# EAGLE board daughterboard (EAGLE 4.16)
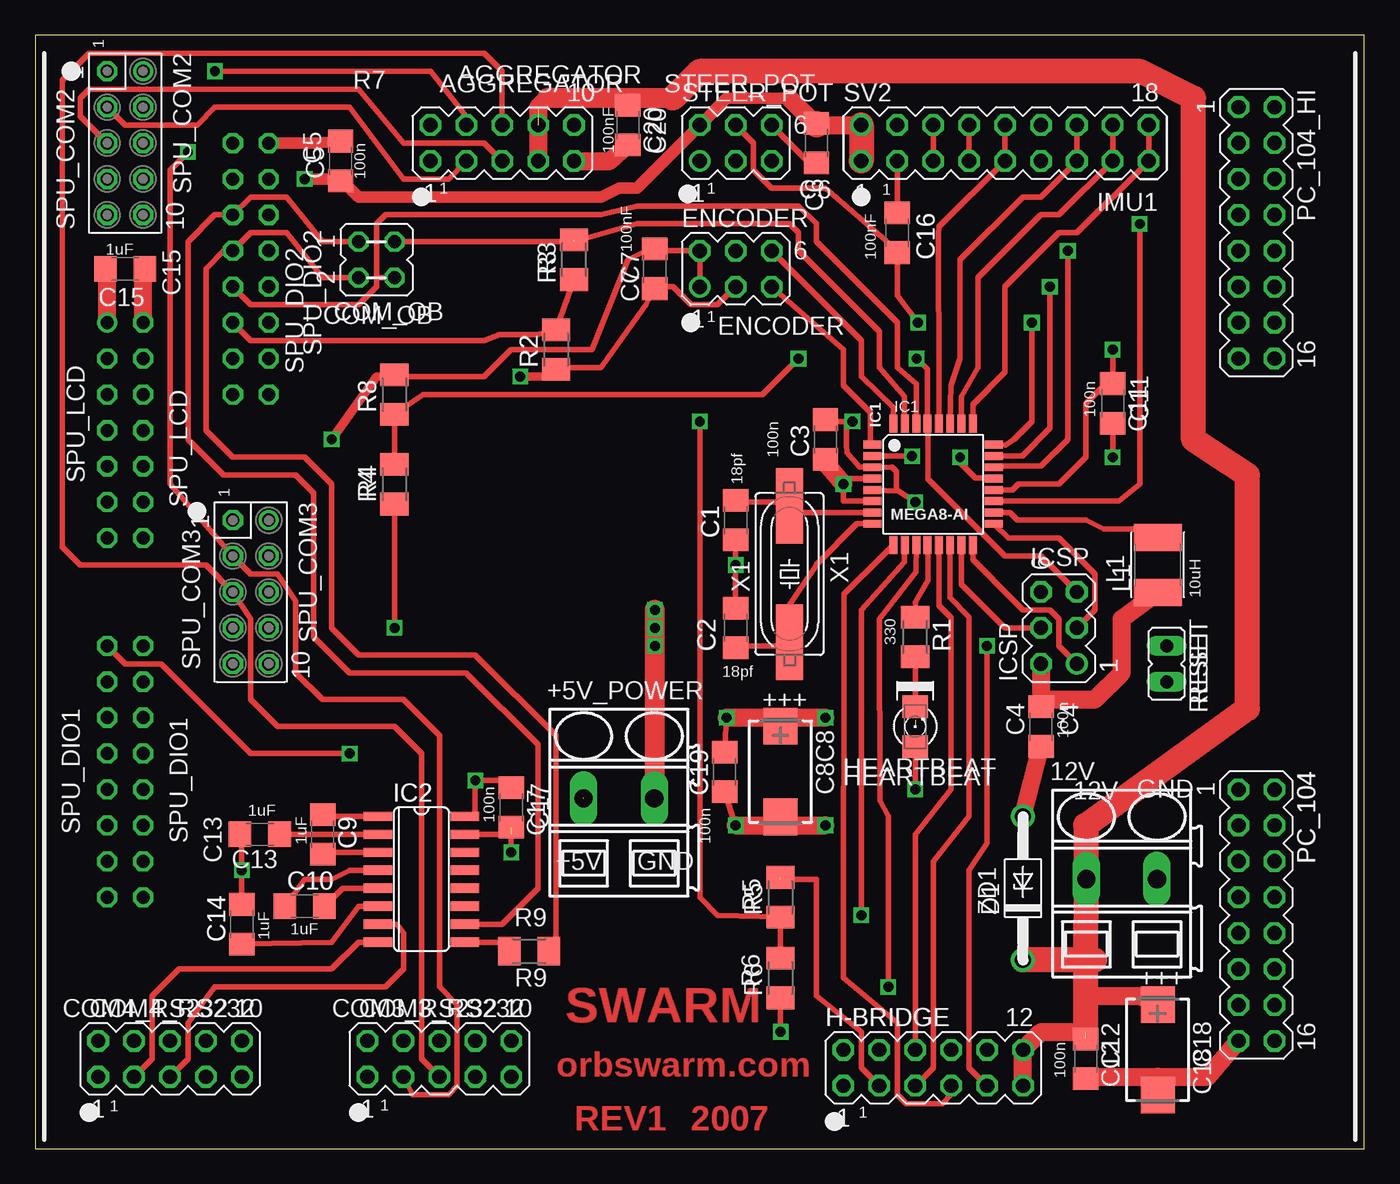
[diagram p0: board, top side]
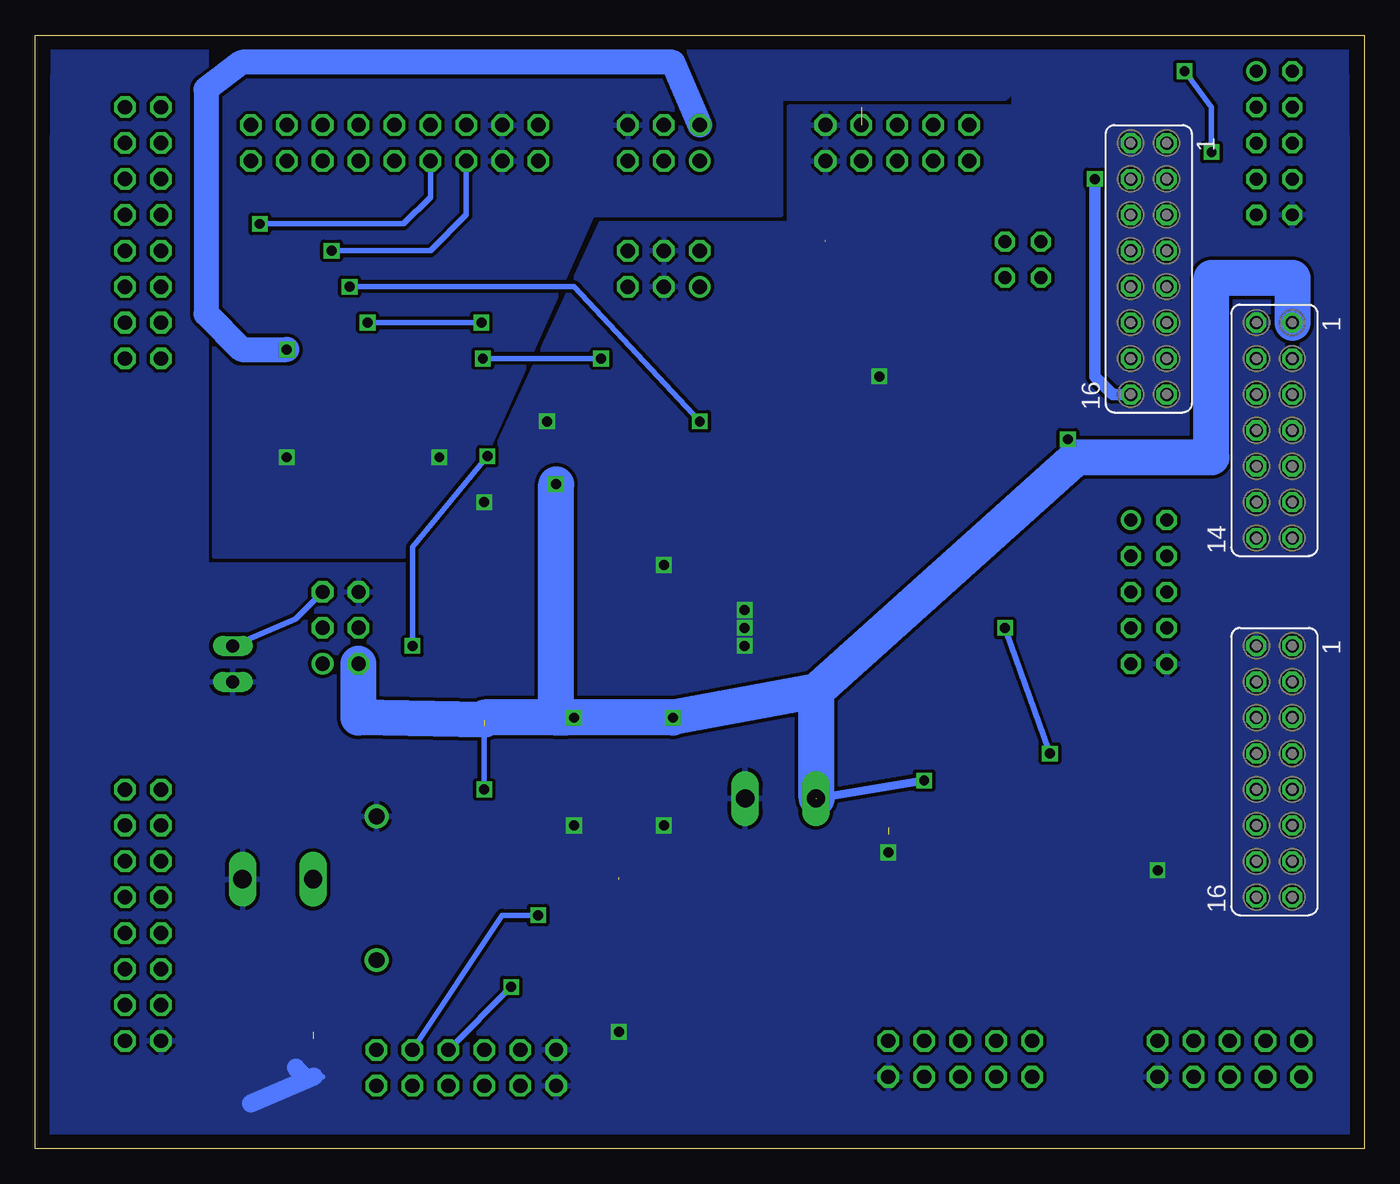
[diagram p1: board, bottom side, seen from below]

Size 93.98 x 78.74 mm. Coordinates in mm from the lower left corner, seen from the top.
Outline: 0,0 93.98,0 93.98,78.74 0,78.74 0,0
Copper layers (1*16): Top 0.035mm / dielectric 1.5mm / Bottom 0.035mm
Design rules "default": minimum track width 10mil, minimum drill 24mil, track to track 8mil, track to pad 8mil, pad to pad 8mil, via to via 8mil, smd to smd 8mil, copper to edge 40mil, drill to drill 8mil, minimum pad ring 10mil, minimum via ring 8mil, stop-mask expansion 4mil, vias tented up to drill 0mil, thermal gap 10mil

## Footprints (pad centres in the part's own frame; a part is rotated, then mirrored left to right if it is on the bottom)
SMKDSP_1,5/2 = drill 1.3 pad 1.676 long: 1 -2.5,0; 2 2.5,0
MA05-2 = drill 1.016 octagon: 1 -5.08,-1.27; 2 -2.54,-1.27; 3 0,-1.27; 4 2.54,-1.27; 5 5.08,-1.27; 6 -5.08,1.27; 7 -2.54,1.27; 8 0,1.27; 9 2.54,1.27; 10 5.08,1.27
C1206 = smd 1.6 x 1.8: 1 -1.4,0; 2 1.4,0
CT7343 = smd 2.6 x 2.4: + 3.2,0; - -3.2,0
JP2Q = drill 0.914 octagon: 1 -1.27,-1.27; 2 -1.27,1.27; 3 1.27,-1.27; 4 1.27,1.27
DO41Z10 = drill 1.118 round: A 5.08,0; C -5.08,0
MA03-2 = drill 1.016 round: 1 -2.54,-1.27 | drill 1.016 octagon: 2 -2.54,1.27; 3 0,-1.27; 4 0,1.27; 5 2.54,-1.27; 6 2.54,1.27
MA06-2 = drill 1.016 octagon: 1 -6.35,-1.27; 2 -6.35,1.27; 3 -3.81,-1.27; 4 -3.81,1.27; 5 -1.27,-1.27; 6 -1.27,1.27; 7 1.27,-1.27; 8 1.27,1.27; 9 3.81,-1.27; 10 3.81,1.27; 11 6.35,-1.27; 12 6.35,1.27
1206 = smd 1.6 x 1.803: A -1.422,0; C 1.422,0
TQFP32-08 = smd 1.27 x 0.559: 1 -4.293,2.8; 2 -4.293,2; 3 -4.293,1.2; 4 -4.293,0.4; 5 -4.293,-0.4; 6 -4.293,-1.2; 7 -4.293,-2; 8 -4.293,-2.8; 17 4.293,-2.8; 18 4.293,-2; 19 4.293,-1.2; 20 4.293,-0.4; 21 4.293,0.4; 22 4.293,1.2; 23 4.293,2; 24 4.293,2.8 | smd 0.559 x 1.27: 9 -2.8,-4.293; 10 -2,-4.293; 11 -1.2,-4.293; 12 -0.4,-4.293; 13 0.4,-4.293; 14 1.2,-4.293; 15 2,-4.293; 16 2.8,-4.293; 25 2.8,4.293; 26 2,4.293; 27 1.2,4.293; 28 0.4,4.293; 29 -0.4,4.293; 30 -1.2,4.293; 31 -2,4.293; 32 -2.8,4.293
SO16 = smd 0.66 x 2.032: 1 -4.445,-3.073; 2 -3.175,-3.073; 3 -1.905,-3.073; 4 -0.635,-3.073; 5 0.635,-3.073; 6 1.905,-3.073; 7 3.175,-3.073; 8 4.445,-3.073; 9 4.445,3.073; 10 3.175,3.073; 11 1.905,3.073; 12 0.635,3.073; 13 -0.635,3.073; 14 -1.905,3.073; 15 -3.175,3.073; 16 -4.445,3.073
L1812 = smd 1.9 x 3.4: 1 -1.95,0; 2 1.95,0
MA08-2 = drill 1.016 octagon: 1 -8.89,-1.27; 2 -8.89,1.27; 3 -6.35,-1.27; 4 -6.35,1.27; 5 -3.81,-1.27; 6 -3.81,1.27; 7 -1.27,-1.27; 8 -1.27,1.27; 9 1.27,-1.27; 10 1.27,1.27; 11 3.81,-1.27; 12 3.81,1.27; 13 6.35,-1.27; 14 6.35,1.27; 15 8.89,-1.27; 16 8.89,1.27
M1206 = smd 1.6 x 2: 1 -1.4,0; 2 1.4,0
JP1 = drill 0.914 long: 1 0,-1.27; 2 0,1.27
FE05-2 = drill 0.914 octagon: 1 -5.08,-1.27; 2 -2.54,-1.27; 3 0,-1.27; 4 2.54,-1.27; 5 5.08,-1.27; 7 -2.54,1.27; 8 0,1.27; 9 2.54,1.27; 10 5.08,1.27 | drill 0.914 round: 6 -5.08,1.27
FE08-2 = drill 0.914 octagon: 1 -8.89,1.27; 2 -8.89,-1.27; 3 -6.35,1.27; 4 -6.35,-1.27; 5 -3.81,1.27; 6 -3.81,-1.27; 7 -1.27,1.27; 8 -1.27,-1.27; 9 1.27,1.27; 10 1.27,-1.27; 11 3.81,1.27; 12 3.81,-1.27; 13 6.35,1.27; 14 6.35,-1.27; 15 8.89,1.27; 16 8.89,-1.27
FE07-2 = drill 0.914 round: 1 -7.62,1.27 | drill 0.914 octagon: 2 -7.62,-1.27; 3 -5.08,1.27; 4 -5.08,-1.27; 5 -2.54,1.27; 6 -2.54,-1.27; 7 0,1.27; 8 0,-1.27; 9 2.54,1.27; 10 2.54,-1.27; 11 5.08,1.27; 12 5.08,-1.27; 13 7.62,1.27; 14 7.62,-1.27
MA09-2 = drill 1.016 octagon: 1 -10.16,-1.27; 2 -10.16,1.27; 3 -7.62,-1.27; 4 -7.62,1.27; 5 -5.08,-1.27; 6 -5.08,1.27; 7 -2.54,-1.27; 8 -2.54,1.27; 9 0,-1.27; 10 0,1.27; 11 2.54,-1.27; 12 2.54,1.27; 13 5.08,-1.27; 14 5.08,1.27; 15 7.62,-1.27; 16 7.62,1.27; 17 10.16,-1.27; 18 10.16,1.27
HC49UP = smd 5.334 x 1.93: 1 -4.826,0; 2 4.826,0

## Placement (x,y rotation side)
12V  SMKDSP_1,5/2  [SMKDSP_1,5/2]  76.83,19.05 0 top
+5V_POWER  SMKDSP_1,5/2  [SMKDSP_1,5/2]  41.27,24.77 0 top
AGGREGATOR  [MA05-2]  33.02,71.12 0 top
C1  18pf  [C1206]  49.53,44.45 90 top
C2  18pf  [C1206]  49.53,36.83 270 top
C3  100n  [C1206]  55.88,50.16 90 top
C4  100n  [C1206]  71.12,29.84 90 top
C5  100n  [C1206]  21.59,69.85 90 top
C6  100nF  [C1206]  55.24,71.12 270 top
C7  100nF  [C1206]  43.81,62.23 270 top
C8  22uF  [CT7343]  52.7,26.67 90 top
C9  1uF  [C1206]  20.32,22.23 270 top
C10  1uF  [C1206]  19.05,17.14 0 top
C11  100n  [C1206]  76.2,52.7 270 top
C12  100n  [C1206]  74.3,6.35 270 top
C13  1uF  [C1206]  15.88,22.23 180 top
C14  1uF  [C1206]  14.61,15.88 90 top
C15  1uF  [C1206]  6.35,62.23 0 top
C16  100nF  [C1206]  60.96,64.77 90 top
C17  100n  [C1206]  33.66,24.13 270 top
C18  22uF  [CT7343]  79.38,6.99 90 top
C19  100n  [C1206]  48.74,26.64 270 top
C20  100n  [C1206]  41.91,72.39 270 top
COM3_RS232  [MA05-2]  28.57,6.35 0 top
COM4_RS232  [MA05-2]  9.53,6.35 0 top
COM_OB  [JP2Q]  24.13,62.87 270 top
D1  [DO41Z10]  69.85,18.41 90 top
ENCODER  [MA03-2]  49.53,62.23 0 top
H-BRIDGE  [MA06-2]  63.5,5.71 0 top
HEARTBEAT  [1206]  62.23,29.84 90 top
IC1  MEGA8-AI  [TQFP32-08]  63.5,46.99 0 top
IC2  MAX3232CSE  [SO16]  27.3,19.05 270 top
ICSP  [MA03-2]  72.39,36.83 90 top
L1  10uH  [L1812]  79.38,41.27 90 top
PC_104  [MA08-2]  86.36,16.51 270 top
PC_104_HI  [MA08-2]  86.36,64.77 270 top
R1  330  [M1206]  62.23,36.2 270 top
R2  1k  [M1206]  36.83,56.52 90 top
R3  510  [M1206]  38.1,62.87 270 top
R4  510  [M1206]  25.4,46.99 90 top
R5  510  [M1206]  52.7,17.78 90 top
R6  1k  [M1206]  52.7,12.06 90 top
R8  1k  [M1206]  25.4,53.34 90 top
R9  510  [M1206]  34.92,13.97 180 top
RESET  [JP1]  80.01,34.29 180 top
SPU_COM2  [FE05-2]  6.35,71.12 270 top
SPU_COM3  [FE05-2]  15.24,39.37 270 top
SPU_DIO1  [FE08-2]  6.35,26.67 270 bottom
SPU_DIO2  [FE08-2]  15.24,62.23 270 bottom
SPU_LCD  [FE07-2]  6.35,50.8 270 bottom
STEER_POT  [MA03-2]  49.53,71.12 0 top
SV2  [MA09-2]  68.58,71.12 0 top
X1  7.37 mHz  [HC49UP]  53.34,40.64 90 top

## Library data of the parts
12V +5V_POWER = con-phoenix-smkdsp
AGGREGATOR COM3_RS232 COM4_RS232 SPU_COM2 SPU_COM3 = foote
C1-C20 L1 R1-R6 R8 R9 = rcl
COM_OB RESET = jumper
D1 = diode
ENCODER H-BRIDGE ICSP PC_104 PC_104_HI STEER_POT SV2 = con-lstb
HEARTBEAT = led
IC1 = atmel
IC2 = maxim
SPU_DIO1 SPU_DIO2 SPU_LCD = con-lsta
X1 = crystal

## Nets
5V_AVR_TXD: COM_OB.2 IC1.31 R3.1
12V_POWER: 12V.1 AGGREGATOR.4 AGGREGATOR.9 C12.1 C18.+ C20.1 D1.C H-BRIDGE.11 H-BRIDGE.12
+3V3 [GND]: C5.1 C6.1 C11.1 IC1.20 SPU_DIO2.16 STEER_POT.2 SV2.1 SV2.2
+5V: +5V_POWER.1 C3.1 C4.2 C7.1 C8.+ C15.1 C17.1 C19.1 ENCODER.1 ENCODER.2 HEARTBEAT.A IC1.4 IC1.6 IC2.16 ICSP.2 L1.1 R8.2 SPU_LCD.1
ADC2: IC1.25 SV2.17 SV2.18
ADC3: IC1.26 SV2.15 SV2.16
ADC4: IC1.27 SV2.13 SV2.14
ADC5: IC1.28 SV2.9 SV2.10
ADC6: IC1.19 SV2.7 SV2.8
ADC7: IC1.22 SV2.5 SV2.6
AVR_RXD: COM_OB.4 IC1.30 SPU_DIO2.9
COM2_RXD: AGGREGATOR.2 SPU_COM2.2
COM2_TXD: AGGREGATOR.3 SPU_COM2.3
COM3_RXD: AGGREGATOR.7 COM3_RS232.2 SPU_COM3.2
COM3_TXD: AGGREGATOR.8 COM3_RS232.3 SPU_COM3.3
COM4_RXD: COM4_RS232.2 IC2.8
COM4_TXD: COM4_RS232.3 IC2.7
CURRENT_SENSE: IC1.23 R5.1 R6.2
DIO_0: R4.1 SPU_DIO1.1
DRIVE_ALI: H-BRIDGE.5 IC1.14
DRIVE_BLI: H-BRIDGE.9 IC1.2
DRIVE_CURRENT: H-BRIDGE.3 R5.2
DRIVE_DIS: H-BRIDGE.7 IC1.9
ENCODER_A: ENCODER.6 IC1.32
ENCODER_B: ENCODER.5 IC1.1
GND [GND]: 12V.2 +5V_POWER.2 AGGREGATOR.5 AGGREGATOR.10 C1.1 C2.1 C3.2 C4.1 C5.2 C6.2 C7.2 C8.- C11.2 C12.2 C13.2 C14.2 C15.2 C16.2 C17.2 C18.- C19.2 C20.2 COM3_RS232.5 COM4_RS232.5 D1.A ENCODER.3 ENCODER.4 H-BRIDGE.1 H-BRIDGE.2 IC1.3 IC1.5 IC1.21 IC2.15 ICSP.6 PC_104.15 R2.1 R6.1 RESET.2 SPU_COM2.5 SPU_COM3.5 SPU_DIO1.2 SPU_DIO2.2 SPU_LCD.2 STEER_POT.6 SV2.3 SV2.4
MCU_RST: IC1.29 ICSP.5 R4.2 R8.1 RESET.1
MISO/PB4: IC1.16 ICSP.1
MOSI/PB3: IC1.15 ICSP.4
N$1: IC1.12 R1.1
N$3: HEARTBEAT.C R1.2
N$4 [GND]: C1.2 IC1.7 X1.2
N$5: IC1.18 L1.2
N$7: C14.1 IC2.6
N$9 [GND]: C2.2 IC1.8 X1.1
N$10: C10.1 IC2.4
N$11: C13.1 IC2.2
N$12: C10.2 IC2.5
N$13: C9.2 IC2.3
N$15: C9.1 IC2.1
N$16: IC2.9 R9.2
SCK/PB5: IC1.17 ICSP.3
SPU_ADC2: SPU_DIO2.8
SPU_ADC4: SPU_DIO2.10
STEER_ALI: H-BRIDGE.6 IC1.13
STEER_BLI [GND]: H-BRIDGE.10 IC1.10
STEER_DIS: H-BRIDGE.8 IC1.11
STEERING_POT: C16.1 IC1.24 STEER_POT.4
TTL_COM4_RXD: COM_OB.3 R9.1 SPU_DIO2.7
TTL_COM4_TXD: COM_OB.1 IC2.10 SPU_DIO2.5
TTL_COM5_RXD: R2.2 R3.2 SPU_DIO2.11

## Tracks (layer width: path | path; a pad name or v marks a point on that pad's centre or on a via)
5V_AVR_TXD  (1 unrouted)
  Top 0.406: 38.73,64.77 R3.1 38.1,64.77 | IC1.31 61.47,51.33 61.47,53.19 59.69,55.24 59.69,57.78 53.98,63.5 53.98,64.77 53.34,65.41 42.55,65.41 38.1,64.14 COM_OB.2
12V_POWER  (2 unrouted)
  Top 0.406: 78.74,10.79 C18.+ | 74.93,13.34 | 74.31,13.34 74.93,13.34
  Top 1.27: 36.2,74.3 35.56,73.66 AGGREGATOR.4 | 41.91,74.3 C20.1 | C18.+ 79.33,10.79 78.08,10.79 | 78.08,10.79 C18.+ | 74.3,10.79 78.08,10.79 | 74.3,8.26 71.12,8.26 H-BRIDGE.12 H-BRIDGE.11
  Top 1.422: 45.09,74.3 41.91,74.3 36.2,74.3 | 12V.1 74.33,22.82 74.3,22.86
  Top 1.778: 45.09,74.3 46.99,76.2 78.11,76.2 81.92,74.3 81.92,50.16 85.72,47.62 85.72,31.11 74.3,22.86 74.3,19.05 | 12V.1 74.31,13.34 74.3,10.79 74.3,8.26 | 74.93,13.34 D1.C
+3V3  (via drill 0.7)
  Top 0.254: 76.2,54.61 C11.1
  Top 0.406: IC1.20 69.11,46.58 69.52,46.99 72.39,46.99 74.3,48.9 74.3,52.7 76.2,54.61 v76.2,56.52 | C5.1 21.59,68.58
  Top 0.813: 53.34,74.3 48.9,74.3 STEER_POT.2 42.55,67.94 41.27,67.94 40.01,67.31 22.86,67.31 21.59,68.58 | C5.1 21.46,68.58 v19.05,68.58
  Top 1.27: 53.34,74.3 55.24,72.39 SV2.2
  Top 1.778: SV2.2 SV2.1 | 55.24,72.39 C6.1
  Bottom 0.406: v76.2,56.52 77.47,56.52
  Bottom 0.813: v19.05,68.58 19.05,54.61 17.78,53.34 SPU_DIO2.16
  Bottom 1.778: STEER_POT.2 48.9,76.83 79.38,76.83 81.92,74.93 81.92,59.05 79.38,56.52 v76.2,56.52
+5V  (via drill 0.7)  (2 unrouted)
  Top 0.254: 53.34,30.48 C8.+
  Top 0.406: IC1.4 58.57,47.4 57.12,47.4 57.15,47.42 v57.15,46.99 57.15,45.79 IC1.6 | 43.18,63.5 C7.1 | ENCODER.1 ENCODER.2 43.18,63.5 | C19.1 48.77,28.57 v48.9,30.48 | 43.18,63.5 41.91,62.87 39.37,56.52 33.66,56.52 31.75,54.61 26.04,54.61 R8.2 | C4.2 71.25,31.11 | v62.23,25.4 HEARTBEAT.A 62.23,28.57 | C17.1 33.15,26.04 v31.11,26.04 31.11,23.5 IC2.16
  Top 0.61: R8.2 25.4,54.61 24.13,54.61 v20.95,50.16
  Top 1.27: 71.12,31.75 C4.2 | C3.1 55.93,48.46 v57.15,46.99 | 52.7,29.21 C8.+ 52.7,30.48 | v48.9,30.48 53.34,30.48 v55.88,30.48 | L1.1 76.83,37.47 76.83,33.66 74.93,31.75 71.12,31.75 | ICSP.2 71.12,31.75 | C15.1 5.08,62.1 SPU_LCD.1
  Bottom 0.406: v62.23,25.4 62.23,29.84
  Bottom 0.61: 20.32,48.9 v20.95,50.16 | v31.11,26.04 38.73,24.77 38.73,27.94
  Bottom 1.27: SPU_LCD.1 5.08,57.78
  Bottom 2.54: ICSP.2 71.12,30.48 62.23,30.33 62.23,30.48 57.15,30.48 | 57.15,30.48 56.52,30.48 | 57.15,30.48 v48.9,30.48 38.73,32.38 | 57.15,30.48 v57.15,46.99 | 38.73,24.77 38.73,32.38 | 38.73,32.38 20.32,48.9 10.79,48.9 10.79,61.59 5.08,61.59 SPU_LCD.1
ADC2
  Top 0.406: IC1.25 66.29,52.25 66.32,52.63 68.58,54.91 68.58,60.96 72.39,64.77 73.66,64.77 SV2.17 SV2.18
ADC3
  Top 0.406: IC1.26 65.51,52.45 65.51,53.19 66.67,55.24 66.67,61.59 71.12,66.04 72.39,66.04 SV2.15 SV2.16
ADC4
  Top 0.406: IC1.27 64.72,52.68 64.77,53.98 65.41,55.88 65.41,62.87 69.85,67.31 71.12,67.31 SV2.13 SV2.14
ADC5
  Top 0.406: IC1.28 63.91,52.91 63.91,53.75 63.88,64.69 63.91,65.2 SV2.9 SV2.10
ADC6  (via drill 0.7)
  Top 0.406: IC1.19 76.63,45.8 78.11,46.99 v78.11,65.41 | SV2.7 SV2.8
  Bottom 0.406: v78.11,65.41 67.94,65.41 66.04,67.31 SV2.7
ADC7  (via drill 0.7)
  Top 0.406: IC1.22 67.86,48.26 71.12,48.26 73.03,50.16 v73.03,63.5 | SV2.5 SV2.6
  Bottom 0.406: v73.03,63.5 66.04,63.5 63.5,66.04 SV2.5
AVR_RXD
  Top 0.406: IC1.30 62.33,54.08 60.96,55.24 60.96,58.42 55.24,64.14 55.24,65.41 53.98,66.67 42.55,66.67 40.01,66.04 24.77,66.04 24.13,65.41 24.13,61.59 | 24.13,61.59 COM_OB.4 | 24.13,61.59 24.13,60.96 22.86,59.69 15.24,59.69 SPU_DIO2.9
COM2_RXD
  Top 0.406: SPU_COM2.2 6.35,72.39 11.43,72.39 12.7,73.66 22.23,73.66 26.04,68.58 29.21,68.58 AGGREGATOR.2
COM2_TXD
  Top 0.406: AGGREGATOR.3 31.75,71.12 26.04,71.12 22.86,74.93 3.81,74.93 3.17,74.3 3.17,73.03 SPU_COM2.3
COM3_RXD  (via drill 0.7)
  Top 0.305: 30.48,73.03 AGGREGATOR.7
  Top 0.406: COM3_RS232.2 26.67,3.81 29.21,3.81 29.84,4.45 29.84,10.16 28.57,11.43 28.57,29.21 26.04,31.75 20.32,31.75 18.41,33.66 18.41,38.73 17.14,40.64 15.24,40.64 SPU_COM3.2 9.53,46.99 9.53,69.22 v10.79,70.48 | 30.48,73.03 27.94,76.2 v12.7,76.2
  Bottom 0.406: v12.7,76.2 10.79,73.66 v10.79,70.48
COM3_TXD
  Top 0.406: COM3_RS232.3 27.3,6.35 27.3,27.94 25.4,29.84 17.14,29.84 15.24,31.75 15.24,37.47 SPU_COM3.3 12.06,41.27 3.17,41.27 1.91,42.55 1.91,75.56 3.81,77.47 31.75,77.47 33.02,76.2 AGGREGATOR.8
COM4_RXD
  Top 0.406: IC2.8 22.86,14.61 20.95,12.7 10.16,12.7 8.26,10.79 8.26,6.35 COM4_RS232.2
COM4_TXD
  Top 0.406: IC2.7 25.58,15.88 26.04,15.24 26.04,12.7 24.77,11.43 12.7,11.43 10.79,8.89 10.79,6.35 COM4_RS232.3
CURRENT_SENSE  (via drill 0.7)
  Top 0.254: R6.2 52.7,13.34 52.07,13.34
  Top 0.406: IC1.23 69.8,49 71.75,50.95 v71.75,60.96 | v46.99,51.44 46.99,17.78 48.26,16.51 R5.1 R6.2 52.07,13.34
  Bottom 0.406: v71.75,60.96 55.88,60.96 v46.99,51.44
DIO_0  (via drill 0.7)
  Top 0.406: SPU_DIO1.1 6.35,34.29 8.89,34.29 15.24,27.94 v22.23,27.94 | 25.4,45.72 R4.1 v25.4,36.83
  Bottom 0.406: v22.23,27.94 v25.4,36.83
DRIVE_ALI
  Top 0.406: IC1.14 64.67,42.67 64.67,38.99 66.04,37.62 66.04,23.5 63.5,20.32 63.5,5.71 H-BRIDGE.5
DRIVE_BLI  (via drill 0.7)
  Top 0.406: 60.22,48.97 IC1.2 | v62,48.97 60.22,48.97 | 60.22,48.97 60.12,48.97 | H-BRIDGE.9 66.04,5.71 66.04,19.68 67.31,21.59 v67.31,35.56
  Bottom 0.406: v62,48.97 67.31,42.55 v67.31,35.56
DRIVE_CURRENT  (1 unrouted)
  Top 0.406: H-BRIDGE.3 58.42,5.71 58.42,8.26 55.24,10.79 55.24,19.05 52.7,19.05
DRIVE_DIS
  Top 0.406: H-BRIDGE.7 64.77,3.81 64.14,3.17 61.59,3.17 60.96,3.81 60.96,8.89 57.15,12.06 57.17,39.24 59.91,41.91 IC1.9
ENCODER_A
  Top 0.406: IC1.32 60.68,52.4 58.42,54.61 58.42,57.15 ENCODER.6
ENCODER_B
  Top 0.406: IC1.1 59.05,49.94 59.05,52.07 57.15,53.98 57.15,56.52 ENCODER.5
GND  (via drill 0.7)  (1 unrouted)
  Top 0.406: v76.2,48.9 C11.2 | C2.1 v49.53,41.27 C1.1 | IC1.5 61.06,46.51 v62.23,45.72 60.88,46.58 60.88,47.9 60.58,48.21 IC1.3 58.27,48.19 57.4,49.22 57.38,49.74 57.38,51.44 | IC1.21 67.76,47.42 66.5,47.42 65.41,48.51 v65.41,48.9 | ENCODER.3 48.26,59.69 46.35,59.69 45.09,60.96 43.81,60.96 | 43.81,60.96 43.18,60.96 C7.2 43.81,60.96 | 56.52,51.44 C3.2 | 56.52,51.44 55.88,51.44 | 57.38,51.44 56.52,51.44 | 57.38,51.44 v57.78,51.44 | 14.61,17.14 C14.2 v14.61,19.68 14.61,22.09 C13.2 | C19.2 v49.53,22.86 | IC2.15 33.66,22.23 | R2.1 36.96,55.24 40.01,55.24 43.18,59.69 43.81,60.96 | R6.1 52.7,10.41 v52.7,8.26 | 33.66,22.86 C17.2 v33.66,20.95 | STEER_POT.6 54.61,69.85 55.24,69.85 C6.2 | 60.96,66.04 61.59,66.67 | C16.2 60.96,66.04 | 60.96,66.04 SV2.3
  Top 0.61: v34.29,54.61 36.83,54.61 36.83,55.24
  Top 0.813: C5.2 19.82,71.12 SPU_DIO2.2
  Top 1.27: D1.A C4.1 | C8.- 52.47,23.23 arc-45 51.57,22.86 | v49.53,22.86 51.57,22.86 | 51.57,22.86 v55.88,22.86 | C15.2 7.62,62.1 SPU_LCD.2 | 84.96,7.49 PC_104.15 82.92,5.08 79.38,5.08 | C12.2 74.3,5.08 79.38,5.08 | 79.38,5.08 C18.- | C20.2 40.64,69.85 AGGREGATOR.5
  Top 1.422: 43.81,24.77 v43.81,38.1
  Bottom 0.406: 73.66,5.08 74.3,5.08 74.93,5.08
  Bottom 1.27: 74.93,5.08 75.56,5.71 | 74.3,5.08 78.74,3.17
  other vias: 43.81,35.56 43.81,36.83
  pour Bottom (isolate 0.254, rank 2): 93.34,0.64 0.64,0.64 1.27,78.11 24.77,77.47 24.77,73.66 40.64,73.66 40.64,65.41 53.98,65.41 61.59,48.9 67.94,41.27 81.92,41.27 81.92,78.11 92.71,78.11
  pour Bottom (isolate 0.254): 20.95,78.11 81.28,78.11 81.28,41.91 67.94,41.91 62.23,48.9 54.61,66.04 41.27,66.04 41.27,74.3 25.4,74.3
MCU_RST  (via drill 0.7)
  Top 0.406: ICSP.5 71.12,41.91 68.58,41.91 63.12,47.37 63.12,50.62 63.1,50.63 IC1.29 63.09,55.12 v62.33,55.88 | v53.98,55.88 51.44,53.34 27.43,53.34 R8.1 | R8.1 25.4,52.07 | R4.2 R8.1
  Bottom 0.406: v53.98,55.88 v62.33,55.88 | RESET.1 75.56,37.47 ICSP.5
MISO/PB4
  Top 0.406: IC1.16 66.3,41.65 69.22,38.73 69.85,38.1 71.75,38.1 72.39,37.47 72.39,35.56 ICSP.1
MOSI/PB3
  Top 0.406: IC1.15 65.5,39.91 68.58,36.83 ICSP.4
N$1
  Top 0.406: IC1.12 63.12,42.68 63.12,40.18 62.23,38.66 R1.1 62.23,37.47
N$3
  Top 0.406: HEARTBEAT.C R1.2
N$4
  Top 0.406: X1.2 52.7,45.72 49.02,45.72 C1.2 | X1.2 53.57,45.01 | IC1.7 53.34,44.99 X1.2
N$5
  Top 0.254: 78.74,43.81 L1.2
  Top 0.406: IC1.18 68.91,44.98 69.44,44.45 74.3,44.45 75.56,43.81 78.74,43.81
N$7
  Top 0.406: C14.1 20.95,14.61 22.86,17.14 IC2.6
N$9
  Top 0.406: C2.2 49.02,35.56 52.7,35.56 X1.1 53.09,38.1 55.24,41.27 55.24,41.33 58.12,44.2 IC1.8
N$10
  Top 0.406: IC2.4 22.23,19.68 20.95,19.05 19.05,19.05 C10.1
N$11
  Top 0.406: 17.14,22.23 C13.1 IC2.2
N$12
  Top 0.406: C10.2 21.72,18.41 IC2.5 24.77,18.41
N$13
  Top 0.406: C9.2 20.32,20.95 IC2.3
N$15
  Top 0.406: C9.1 20.32,23.5 IC2.1
N$16
  Top 0.406: R9.2 33.66,13.97 33.66,14.61 IC2.9
SCK/PB5
  Top 0.406: ICSP.3 74.93,38.1 74.93,40.64 72.39,43.18 68.8,43.18 IC1.17
STEER_ALI
  Top 0.406: IC1.13 63.91,38.43 64.77,37.57 64.77,25.4 62.23,22.23 H-BRIDGE.6
STEER_BLI  (via drill 0.7)
  Top 0.406: IC1.10 61.47,42.66 61.47,41.48 58.42,38.1 v58.42,16.51
  Bottom 0.406: v58.42,16.51 60.96,16.51 H-BRIDGE.10
STEER_DIS  (via drill 0.7)
  Top 0.406: IC1.11 62.28,40.77 59.69,37.47 59.69,37.29 59.74,24.64 60.33,23.5 v60.33,11.43
  Bottom 0.406: H-BRIDGE.8 v60.33,11.43
STEERING_POT  (via drill 0.7)
  Top 0.406: STEER_POT.4 50.8,71.12 50.8,69.22 52.07,67.94 55.88,67.94 60.96,63.5 C16.1 60.96,60.33 v62.43,58.42 | IC1.24 68.6,49.76 69.22,50.16 70.48,51.44 v70.48,58.42
  Bottom 0.406: v70.48,58.42 v62.43,58.42
TTL_COM4_RXD
  Top 0.406: COM_OB.3 20.32,61.59 17.78,64.77 15.24,64.77 SPU_DIO2.7 13.34,63.5 12.06,62.23 12.06,50.8 13.97,48.9 19.05,48.9 20.95,46.99 20.95,36.83 22.86,34.92 31.11,34.92 36.83,29.21 36.83,13.97 R9.1
TTL_COM4_TXD
  Top 0.406: COM_OB.1 20.32,64.14 17.78,67.31 15.24,67.31 SPU_DIO2.5 12.7,66.04 10.79,64.14 10.79,50.16 13.34,47.62 18.41,47.62 19.68,46.35 19.68,36.2 22.23,33.66 30.48,33.66 35.56,28.57 35.56,18.41 33.02,15.88 IC2.10
TTL_COM5_RXD
  Top 0.406: R2.2 36.83,57.78 | R2.2 R3.2 | R2.2 35.49,57.56 32.82,57.56 31.75,57.15 15.24,57.15 SPU_DIO2.11

## Text on the board
Top: SWARM | orbswarm.com | REV1 | 2007
_tsilk: 1 | R7 | SPU_COM2 | AGGREGATOR | STEER_POT | 100nF | C20 | C5 | 100n | 1 | 1 | IMU1 | 100nF | C6 | 1 | SPU_DIO2 | R3 | 1uF | 100nF | C16 | C7 | C15 | COM_OB | 1 | ENCODER | SPU_LCD | R2 | C11 | 100n | R8 | IC1 | 100n | C3 | 1 | 18pf | R4 | SPU_COM3 | MEGA8-AI | C1 | ICSP | X1 | L1 | 10uH | 330 | C2 | R1 | RESET | 1 | 18pf | +++ | SPU_DIO1 | C4 | 100n | C19 | HEARTBEAT | PC_104 | 100n | C17 | 12V | GND | IC2 | C8 | 1uF | 100n | C13 | 1uF | C9 | +5V | GND | C10 | R9 | R5 | ZD1 | C14 | 1uF | 1uF | +++ | R6 | COM4_RS232 | COM3_RS232 | H-BRIDGE | C12 | 100n | C18 | 1 | 1 | 1
_bsilk: 1 | 1 | 1